# Altium PCB PCB2.PcbDoc (part 1 of 2)
Units mm, origin at the board's own origin, x right, y up, seen from the top; angles counter-clockwise.
Board outline 126 x 36 mm, 2 copper layers (Top Layer, Bottom Layer); 351 components, 48 nets, 702 pads, 346 vias.
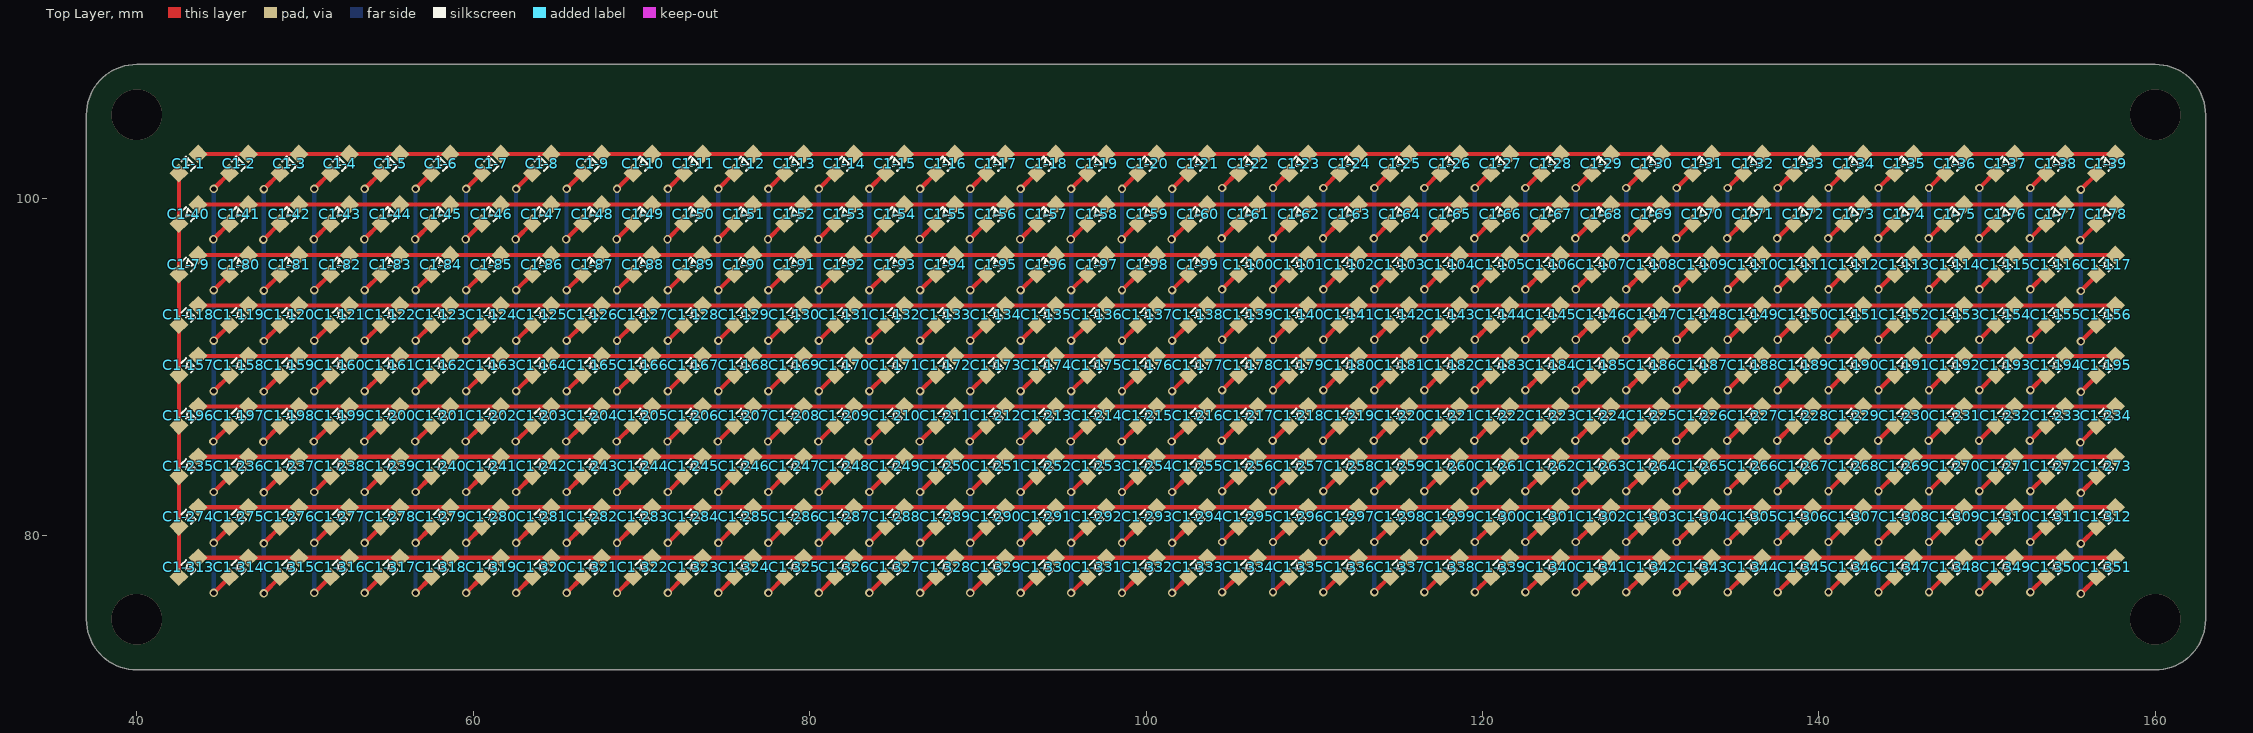
[diagram p0: Top Layer view]
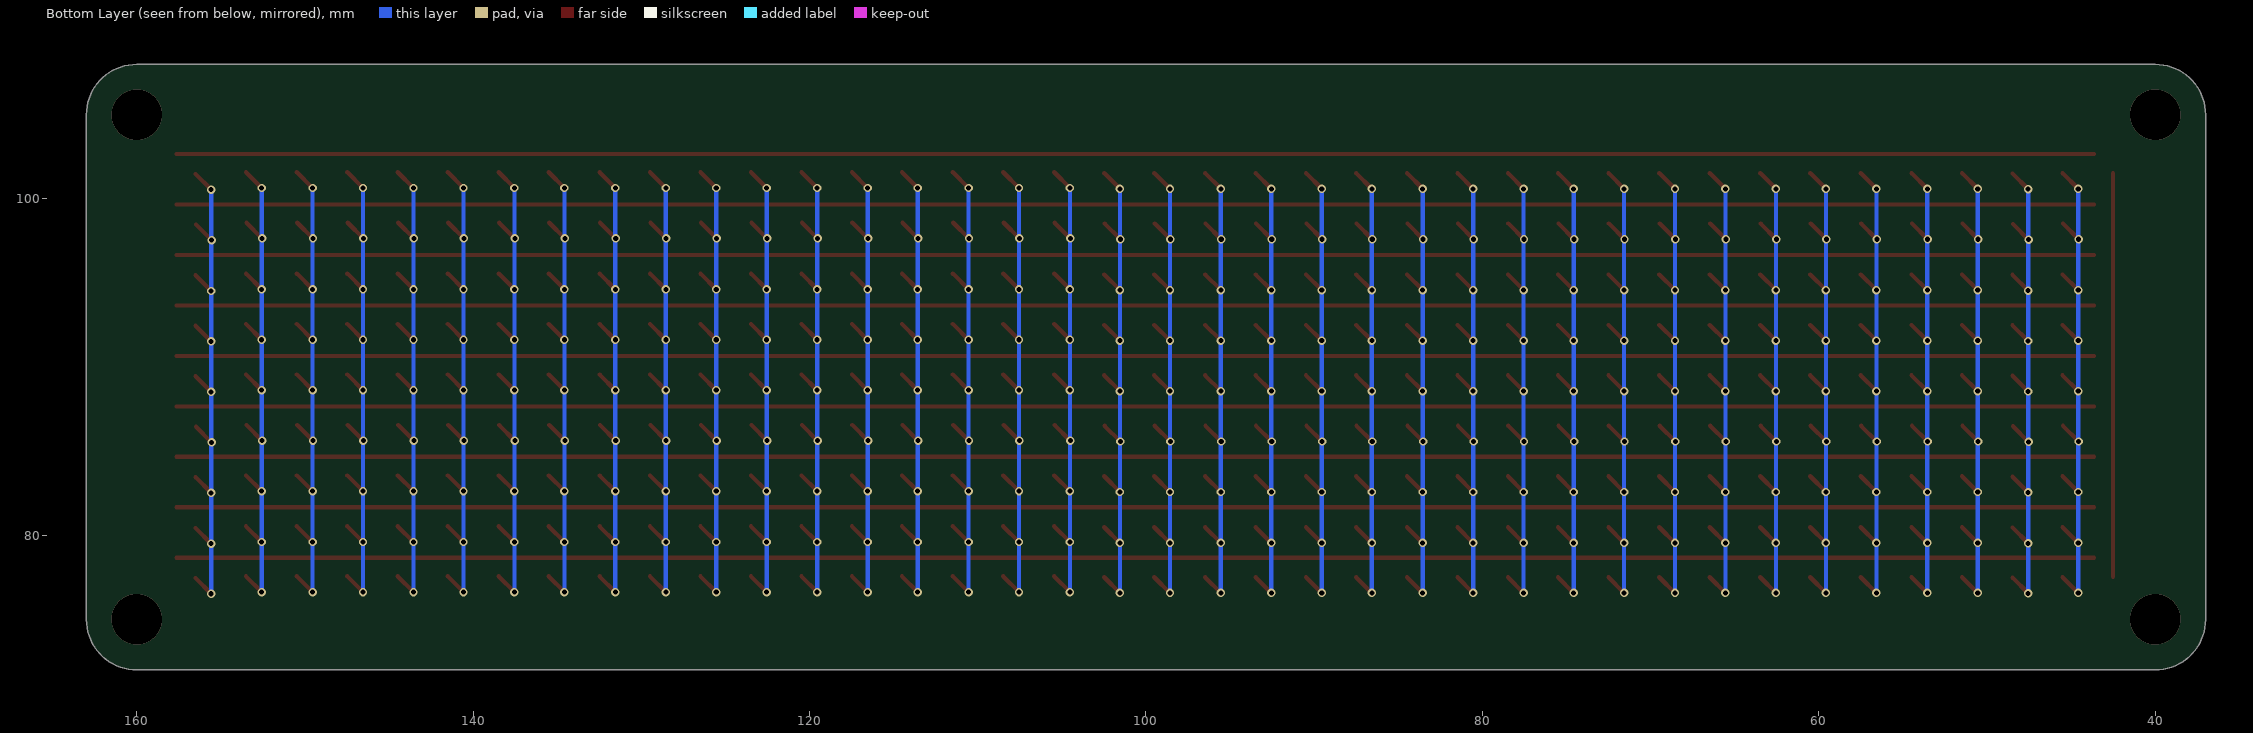
[diagram p1: Bottom Layer view, seen from below]

## Layer stack, top to bottom
Top Solder: solder mask 0.0102, Solder Resist, Dk 3.5
Top Layer: signal copper 0.0356
Dielectric 1: dielectric 0.32, FR-4, Dk 4.8
Bottom Layer: signal copper 0.0356
Bottom Solder: solder mask 0.0102, Solder Resist, Dk 3.5

## Board outline
40,72 cw(c40,75) 37,75 37,105 cw(c40,105) 40,108 160,108 cw(c160,105) 163,105 163,75 cw(c160,75) 160,72

## Design rules (kind name [scope] priority, off if disabled: settings)
Clearance [All] p1: gap=0.152 ignorepadtopadclearanceinfootprint=FALSE except(0.254: Arc-Arc Arc-Track Track-Track)
ComponentClearance [All] p1: gap=0 collisioncheckmode=3 verticalgap=0 showdistances=FALSE
PolygonConnect [All] p1: connectstyle=Relief reliefconductorwidth=0.254 reliefentries=4 polygonreliefangle="90 Angle" airgapwidth=0.254
RoutingCorners [All] p1: cornerstyle=Round minsetback=2.54 maxsetback=2.54
RoutingLayers RoutingLayers_1 [All] p1: top layer_v5=TRUE bottom layer_v5=TRUE
RoutingVias [All] p1: holewidth=0.3 width=0.5 viastyle="Through Hole" minholewidth=0.3 minwidth=0.5 maxholewidth=0.3 maxwidth=0.5
ShortCircuit [All] p1: allowed=TRUE
SolderMaskExpansion [All] p1: expansion=0.102
Width [All] p1: maxlimit=0.254 minlimit=0.254 preferedwidth=0.254
26 further rules are at their usual default settings.

## Components (designator, comment, footprint, x,y, rotation, side; value= is the part's Value field where it differs from the comment)
C1-1 "LED" "LED 0603(2)" 43.1,102.125 r225 top
C1-2 "LED" "LED 0603(2)" 46.1,102.125 r225 top
C1-3 "LED" "LED 0603(2)" 49.1,102.125 r225 top
C1-4 "LED" "LED 0603(2)" 52.1,102.125 r225 top
C1-5 "LED" "LED 0603(2)" 55.1,102.125 r225 top
C1-6 "LED" "LED 0603(2)" 58.1,102.125 r225 top
C1-7 "LED" "LED 0603(2)" 61.1,102.125 r225 top
C1-8 "LED" "LED 0603(2)" 64.1,102.125 r225 top
C1-9 "LED" "LED 0603(2)" 67.1,102.125 r225 top
C1-10 "LED" "LED 0603(2)" 70.1,102.125 r225 top
C1-11 "LED" "LED 0603(2)" 73.1,102.125 r225 top
C1-12 "LED" "LED 0603(2)" 76.1,102.125 r225 top
C1-13 "LED" "LED 0603(2)" 79.1,102.125 r225 top
C1-14 "LED" "LED 0603(2)" 82.1,102.125 r225 top
C1-15 "LED" "LED 0603(2)" 85.1,102.125 r225 top
C1-16 "LED" "LED 0603(2)" 88.1,102.125 r225 top
C1-17 "LED" "LED 0603(2)" 91.1,102.125 r225 top
C1-18 "LED" "LED 0603(2)" 94.1,102.125 r225 top
C1-19 "LED" "LED 0603(2)" 97.1,102.125 r225 top
C1-20 "LED" "LED 0603(2)" 100.1,102.125 r225 top
C1-21 "LED" "LED 0603(2)" 103.1,102.125 r225 top
C1-22 "LED" "LED 0603(2)" 106.1,102.125 r225 top
C1-23 "LED" "LED 0603(2)" 109.1,102.125 r225 top
C1-24 "LED" "LED 0603(2)" 112.1,102.125 r225 top
C1-25 "LED" "LED 0603(2)" 115.1,102.125 r225 top
C1-26 "LED" "LED 0603(2)" 118.1,102.125 r225 top
C1-27 "LED" "LED 0603(2)" 121.1,102.125 r225 top
C1-28 "LED" "LED 0603(2)" 124.1,102.125 r225 top
C1-29 "LED" "LED 0603(2)" 127.1,102.125 r225 top
C1-30 "LED" "LED 0603(2)" 130.1,102.125 r225 top
C1-31 "LED" "LED 0603(2)" 133.1,102.125 r225 top
C1-32 "LED" "LED 0603(2)" 136.1,102.125 r225 top
C1-33 "LED" "LED 0603(2)" 139.1,102.125 r225 top
C1-34 "LED" "LED 0603(2)" 142.1,102.125 r225 top
C1-35 "LED" "LED 0603(2)" 145.1,102.125 r225 top
C1-36 "LED" "LED 0603(2)" 148.1,102.125 r225 top
C1-37 "LED" "LED 0603(2)" 151.1,102.125 r225 top
C1-38 "LED" "LED 0603(2)" 154.1,102.125 r225 top
C1-39 "LED" "LED 0603(2)" 157.1,102.125 r225 top
C1-40 "LED" "LED 0603(2)" 43.1,99.125 r225 top
C1-41 "LED" "LED 0603(2)" 46.1,99.125 r225 top
C1-42 "LED" "LED 0603(2)" 49.1,99.125 r225 top
C1-43 "LED" "LED 0603(2)" 52.1,99.125 r225 top
C1-44 "LED" "LED 0603(2)" 55.1,99.125 r225 top
C1-45 "LED" "LED 0603(2)" 58.1,99.125 r225 top
C1-46 "LED" "LED 0603(2)" 61.1,99.125 r225 top
C1-47 "LED" "LED 0603(2)" 64.1,99.125 r225 top
C1-48 "LED" "LED 0603(2)" 67.1,99.125 r225 top
C1-49 "LED" "LED 0603(2)" 70.1,99.125 r225 top
C1-50 "LED" "LED 0603(2)" 73.1,99.125 r225 top
C1-51 "LED" "LED 0603(2)" 76.1,99.125 r225 top
C1-52 "LED" "LED 0603(2)" 79.1,99.125 r225 top
C1-53 "LED" "LED 0603(2)" 82.1,99.125 r225 top
C1-54 "LED" "LED 0603(2)" 85.1,99.125 r225 top
C1-55 "LED" "LED 0603(2)" 88.1,99.125 r225 top
C1-56 "LED" "LED 0603(2)" 91.1,99.125 r225 top
C1-57 "LED" "LED 0603(2)" 94.1,99.125 r225 top
C1-58 "LED" "LED 0603(2)" 97.1,99.125 r225 top
C1-59 "LED" "LED 0603(2)" 100.1,99.125 r225 top
C1-60 "LED" "LED 0603(2)" 103.1,99.125 r225 top
C1-61 "LED" "LED 0603(2)" 106.1,99.125 r225 top
C1-62 "LED" "LED 0603(2)" 109.1,99.125 r225 top
C1-63 "LED" "LED 0603(2)" 112.1,99.125 r225 top
C1-64 "LED" "LED 0603(2)" 115.1,99.125 r225 top
C1-65 "LED" "LED 0603(2)" 118.1,99.125 r225 top
C1-66 "LED" "LED 0603(2)" 121.1,99.125 r225 top
C1-67 "LED" "LED 0603(2)" 124.1,99.125 r225 top
C1-68 "LED" "LED 0603(2)" 127.1,99.125 r225 top
C1-69 "LED" "LED 0603(2)" 130.1,99.125 r225 top
C1-70 "LED" "LED 0603(2)" 133.1,99.125 r225 top
C1-71 "LED" "LED 0603(2)" 136.1,99.125 r225 top
C1-72 "LED" "LED 0603(2)" 139.1,99.125 r225 top
C1-73 "LED" "LED 0603(2)" 142.1,99.125 r225 top
C1-74 "LED" "LED 0603(2)" 145.1,99.125 r225 top
C1-75 "LED" "LED 0603(2)" 148.1,99.125 r225 top
C1-76 "LED" "LED 0603(2)" 151.1,99.125 r225 top
C1-77 "LED" "LED 0603(2)" 154.1,99.125 r225 top
C1-78 "LED" "LED 0603(2)" 157.1,99.125 r225 top
C1-79 "LED" "LED 0603(2)" 43.1,96.125 r225 top
C1-80 "LED" "LED 0603(2)" 46.1,96.125 r225 top
C1-81 "LED" "LED 0603(2)" 49.1,96.125 r225 top
C1-82 "LED" "LED 0603(2)" 52.1,96.125 r225 top
C1-83 "LED" "LED 0603(2)" 55.1,96.125 r225 top
C1-84 "LED" "LED 0603(2)" 58.1,96.125 r225 top
C1-85 "LED" "LED 0603(2)" 61.1,96.125 r225 top
C1-86 "LED" "LED 0603(2)" 64.1,96.125 r225 top
C1-87 "LED" "LED 0603(2)" 67.1,96.125 r225 top
C1-88 "LED" "LED 0603(2)" 70.1,96.125 r225 top
C1-89 "LED" "LED 0603(2)" 73.1,96.125 r225 top
C1-90 "LED" "LED 0603(2)" 76.1,96.125 r225 top
C1-91 "LED" "LED 0603(2)" 79.1,96.125 r225 top
C1-92 "LED" "LED 0603(2)" 82.1,96.125 r225 top
C1-93 "LED" "LED 0603(2)" 85.1,96.125 r225 top
C1-94 "LED" "LED 0603(2)" 88.1,96.125 r225 top
C1-95 "LED" "LED 0603(2)" 91.1,96.125 r225 top
C1-96 "LED" "LED 0603(2)" 94.1,96.125 r225 top
C1-97 "LED" "LED 0603(2)" 97.1,96.125 r225 top
C1-98 "LED" "LED 0603(2)" 100.1,96.125 r225 top
C1-99 "LED" "LED 0603(2)" 103.1,96.125 r225 top
C1-100 "LED" "LED 0603(2)" 106.1,96.125 r225 top
C1-101 "LED" "LED 0603(2)" 109.1,96.125 r225 top
C1-102 "LED" "LED 0603(2)" 112.1,96.125 r225 top
C1-103 "LED" "LED 0603(2)" 115.1,96.125 r225 top
C1-104 "LED" "LED 0603(2)" 118.1,96.125 r225 top
C1-105 "LED" "LED 0603(2)" 121.1,96.125 r225 top
C1-106 "LED" "LED 0603(2)" 124.1,96.125 r225 top
C1-107 "LED" "LED 0603(2)" 127.1,96.125 r225 top
C1-108 "LED" "LED 0603(2)" 130.1,96.125 r225 top
C1-109 "LED" "LED 0603(2)" 133.1,96.125 r225 top
C1-110 "LED" "LED 0603(2)" 136.1,96.125 r225 top
C1-111 "LED" "LED 0603(2)" 139.1,96.125 r225 top
C1-112 "LED" "LED 0603(2)" 142.1,96.125 r225 top
C1-113 "LED" "LED 0603(2)" 145.1,96.125 r225 top
C1-114 "LED" "LED 0603(2)" 148.1,96.125 r225 top
C1-115 "LED" "LED 0603(2)" 151.1,96.125 r225 top
C1-116 "LED" "LED 0603(2)" 154.1,96.125 r225 top
C1-117 "LED" "LED 0603(2)" 157.1,96.125 r225 top
C1-118 "LED" "LED 0603(2)" 43.1,93.125 r225 top
C1-119 "LED" "LED 0603(2)" 46.1,93.125 r225 top
C1-120 "LED" "LED 0603(2)" 49.1,93.125 r225 top
C1-121 "LED" "LED 0603(2)" 52.1,93.125 r225 top
C1-122 "LED" "LED 0603(2)" 55.1,93.125 r225 top
C1-123 "LED" "LED 0603(2)" 58.1,93.125 r225 top
C1-124 "LED" "LED 0603(2)" 61.1,93.125 r225 top
C1-125 "LED" "LED 0603(2)" 64.1,93.125 r225 top
C1-126 "LED" "LED 0603(2)" 67.1,93.125 r225 top
C1-127 "LED" "LED 0603(2)" 70.1,93.125 r225 top
C1-128 "LED" "LED 0603(2)" 73.1,93.125 r225 top
C1-129 "LED" "LED 0603(2)" 76.1,93.125 r225 top
C1-130 "LED" "LED 0603(2)" 79.1,93.125 r225 top
C1-131 "LED" "LED 0603(2)" 82.1,93.125 r225 top
C1-132 "LED" "LED 0603(2)" 85.1,93.125 r225 top
C1-133 "LED" "LED 0603(2)" 88.1,93.125 r225 top
C1-134 "LED" "LED 0603(2)" 91.1,93.125 r225 top
C1-135 "LED" "LED 0603(2)" 94.1,93.125 r225 top
C1-136 "LED" "LED 0603(2)" 97.1,93.125 r225 top
C1-137 "LED" "LED 0603(2)" 100.1,93.125 r225 top
C1-138 "LED" "LED 0603(2)" 103.1,93.125 r225 top
C1-139 "LED" "LED 0603(2)" 106.1,93.125 r225 top
C1-140 "LED" "LED 0603(2)" 109.1,93.125 r225 top
C1-141 "LED" "LED 0603(2)" 112.1,93.125 r225 top
C1-142 "LED" "LED 0603(2)" 115.1,93.125 r225 top
C1-143 "LED" "LED 0603(2)" 118.1,93.125 r225 top
C1-144 "LED" "LED 0603(2)" 121.1,93.125 r225 top
C1-145 "LED" "LED 0603(2)" 124.1,93.125 r225 top
C1-146 "LED" "LED 0603(2)" 127.1,93.125 r225 top
C1-147 "LED" "LED 0603(2)" 130.1,93.125 r225 top
C1-148 "LED" "LED 0603(2)" 133.1,93.125 r225 top
C1-149 "LED" "LED 0603(2)" 136.1,93.125 r225 top
C1-150 "LED" "LED 0603(2)" 139.1,93.125 r225 top
C1-151 "LED" "LED 0603(2)" 142.1,93.125 r225 top
C1-152 "LED" "LED 0603(2)" 145.1,93.125 r225 top
C1-153 "LED" "LED 0603(2)" 148.1,93.125 r225 top
C1-154 "LED" "LED 0603(2)" 151.1,93.125 r225 top
C1-155 "LED" "LED 0603(2)" 154.1,93.125 r225 top
C1-156 "LED" "LED 0603(2)" 157.1,93.125 r225 top
C1-157 "LED" "LED 0603(2)" 43.1,90.125 r225 top
C1-158 "LED" "LED 0603(2)" 46.1,90.125 r225 top
C1-159 "LED" "LED 0603(2)" 49.1,90.125 r225 top
C1-160 "LED" "LED 0603(2)" 52.1,90.125 r225 top
C1-161 "LED" "LED 0603(2)" 55.1,90.125 r225 top
C1-162 "LED" "LED 0603(2)" 58.1,90.125 r225 top
C1-163 "LED" "LED 0603(2)" 61.1,90.125 r225 top
C1-164 "LED" "LED 0603(2)" 64.1,90.125 r225 top
C1-165 "LED" "LED 0603(2)" 67.1,90.125 r225 top
C1-166 "LED" "LED 0603(2)" 70.1,90.125 r225 top
C1-167 "LED" "LED 0603(2)" 73.1,90.125 r225 top
C1-168 "LED" "LED 0603(2)" 76.1,90.125 r225 top
C1-169 "LED" "LED 0603(2)" 79.1,90.125 r225 top
C1-170 "LED" "LED 0603(2)" 82.1,90.125 r225 top
C1-171 "LED" "LED 0603(2)" 85.1,90.125 r225 top
C1-172 "LED" "LED 0603(2)" 88.1,90.125 r225 top
C1-173 "LED" "LED 0603(2)" 91.1,90.125 r225 top
C1-174 "LED" "LED 0603(2)" 94.1,90.125 r225 top
C1-175 "LED" "LED 0603(2)" 97.1,90.125 r225 top
C1-176 "LED" "LED 0603(2)" 100.1,90.125 r225 top
C1-177 "LED" "LED 0603(2)" 103.1,90.125 r225 top
C1-178 "LED" "LED 0603(2)" 106.1,90.125 r225 top
C1-179 "LED" "LED 0603(2)" 109.1,90.125 r225 top
C1-180 "LED" "LED 0603(2)" 112.1,90.125 r225 top
C1-181 "LED" "LED 0603(2)" 115.1,90.125 r225 top
C1-182 "LED" "LED 0603(2)" 118.1,90.125 r225 top
C1-183 "LED" "LED 0603(2)" 121.1,90.125 r225 top
C1-184 "LED" "LED 0603(2)" 124.1,90.125 r225 top
C1-185 "LED" "LED 0603(2)" 127.1,90.125 r225 top
C1-186 "LED" "LED 0603(2)" 130.1,90.125 r225 top
C1-187 "LED" "LED 0603(2)" 133.1,90.125 r225 top
C1-188 "LED" "LED 0603(2)" 136.1,90.125 r225 top
C1-189 "LED" "LED 0603(2)" 139.1,90.125 r225 top
C1-190 "LED" "LED 0603(2)" 142.1,90.125 r225 top
C1-191 "LED" "LED 0603(2)" 145.1,90.125 r225 top
C1-192 "LED" "LED 0603(2)" 148.1,90.125 r225 top
C1-193 "LED" "LED 0603(2)" 151.1,90.125 r225 top
C1-194 "LED" "LED 0603(2)" 154.1,90.125 r225 top
C1-195 "LED" "LED 0603(2)" 157.1,90.125 r225 top
C1-196 "LED" "LED 0603(2)" 43.1,87.125 r225 top
C1-197 "LED" "LED 0603(2)" 46.1,87.125 r225 top
C1-198 "LED" "LED 0603(2)" 49.1,87.125 r225 top
C1-199 "LED" "LED 0603(2)" 52.1,87.125 r225 top
C1-200 "LED" "LED 0603(2)" 55.1,87.125 r225 top
C1-201 "LED" "LED 0603(2)" 58.1,87.125 r225 top
C1-202 "LED" "LED 0603(2)" 61.1,87.125 r225 top
C1-203 "LED" "LED 0603(2)" 64.1,87.125 r225 top
C1-204 "LED" "LED 0603(2)" 67.1,87.125 r225 top
C1-205 "LED" "LED 0603(2)" 70.1,87.125 r225 top
C1-206 "LED" "LED 0603(2)" 73.1,87.125 r225 top
C1-207 "LED" "LED 0603(2)" 76.1,87.125 r225 top
C1-208 "LED" "LED 0603(2)" 79.1,87.125 r225 top
C1-209 "LED" "LED 0603(2)" 82.1,87.125 r225 top
C1-210 "LED" "LED 0603(2)" 85.1,87.125 r225 top
C1-211 "LED" "LED 0603(2)" 88.1,87.125 r225 top
C1-212 "LED" "LED 0603(2)" 91.1,87.125 r225 top
C1-213 "LED" "LED 0603(2)" 94.1,87.125 r225 top
C1-214 "LED" "LED 0603(2)" 97.1,87.125 r225 top
C1-215 "LED" "LED 0603(2)" 100.1,87.125 r225 top
C1-216 "LED" "LED 0603(2)" 103.1,87.125 r225 top
C1-217 "LED" "LED 0603(2)" 106.1,87.125 r225 top
C1-218 "LED" "LED 0603(2)" 109.1,87.125 r225 top
C1-219 "LED" "LED 0603(2)" 112.1,87.125 r225 top
C1-220 "LED" "LED 0603(2)" 115.1,87.125 r225 top
C1-221 "LED" "LED 0603(2)" 118.1,87.125 r225 top
C1-222 "LED" "LED 0603(2)" 121.1,87.125 r225 top
C1-223 "LED" "LED 0603(2)" 124.1,87.125 r225 top
C1-224 "LED" "LED 0603(2)" 127.1,87.125 r225 top
C1-225 "LED" "LED 0603(2)" 130.1,87.125 r225 top
C1-226 "LED" "LED 0603(2)" 133.1,87.125 r225 top
C1-227 "LED" "LED 0603(2)" 136.1,87.125 r225 top
C1-228 "LED" "LED 0603(2)" 139.1,87.125 r225 top
C1-229 "LED" "LED 0603(2)" 142.1,87.125 r225 top
C1-230 "LED" "LED 0603(2)" 145.1,87.125 r225 top
C1-231 "LED" "LED 0603(2)" 148.1,87.125 r225 top
C1-232 "LED" "LED 0603(2)" 151.1,87.125 r225 top
C1-233 "LED" "LED 0603(2)" 154.1,87.125 r225 top
C1-234 "LED" "LED 0603(2)" 157.1,87.125 r225 top
C1-235 "LED" "LED 0603(2)" 43.1,84.125 r225 top
C1-236 "LED" "LED 0603(2)" 46.1,84.125 r225 top
C1-237 "LED" "LED 0603(2)" 49.1,84.125 r225 top
C1-238 "LED" "LED 0603(2)" 52.1,84.125 r225 top
C1-239 "LED" "LED 0603(2)" 55.1,84.125 r225 top
C1-240 "LED" "LED 0603(2)" 58.1,84.125 r225 top
C1-241 "LED" "LED 0603(2)" 61.1,84.125 r225 top
C1-242 "LED" "LED 0603(2)" 64.1,84.125 r225 top
C1-243 "LED" "LED 0603(2)" 67.1,84.125 r225 top
C1-244 "LED" "LED 0603(2)" 70.1,84.125 r225 top
C1-245 "LED" "LED 0603(2)" 73.1,84.125 r225 top
C1-246 "LED" "LED 0603(2)" 76.1,84.125 r225 top
C1-247 "LED" "LED 0603(2)" 79.1,84.125 r225 top
C1-248 "LED" "LED 0603(2)" 82.1,84.125 r225 top
C1-249 "LED" "LED 0603(2)" 85.1,84.125 r225 top
C1-250 "LED" "LED 0603(2)" 88.1,84.125 r225 top
C1-251 "LED" "LED 0603(2)" 91.1,84.125 r225 top
C1-252 "LED" "LED 0603(2)" 94.1,84.125 r225 top
C1-253 "LED" "LED 0603(2)" 97.1,84.125 r225 top
C1-254 "LED" "LED 0603(2)" 100.1,84.125 r225 top
C1-255 "LED" "LED 0603(2)" 103.1,84.125 r225 top
C1-256 "LED" "LED 0603(2)" 106.1,84.125 r225 top
C1-257 "LED" "LED 0603(2)" 109.1,84.125 r225 top
C1-258 "LED" "LED 0603(2)" 112.1,84.125 r225 top
C1-259 "LED" "LED 0603(2)" 115.1,84.125 r225 top
C1-260 "LED" "LED 0603(2)" 118.1,84.125 r225 top
C1-261 "LED" "LED 0603(2)" 121.1,84.125 r225 top
C1-262 "LED" "LED 0603(2)" 124.1,84.125 r225 top
C1-263 "LED" "LED 0603(2)" 127.1,84.125 r225 top
C1-264 "LED" "LED 0603(2)" 130.1,84.125 r225 top
C1-265 "LED" "LED 0603(2)" 133.1,84.125 r225 top
C1-266 "LED" "LED 0603(2)" 136.1,84.125 r225 top
C1-267 "LED" "LED 0603(2)" 139.1,84.125 r225 top
C1-268 "LED" "LED 0603(2)" 142.1,84.125 r225 top
C1-269 "LED" "LED 0603(2)" 145.1,84.125 r225 top
C1-270 "LED" "LED 0603(2)" 148.1,84.125 r225 top
C1-271 "LED" "LED 0603(2)" 151.1,84.125 r225 top
C1-272 "LED" "LED 0603(2)" 154.1,84.125 r225 top
C1-273 "LED" "LED 0603(2)" 157.1,84.125 r225 top
C1-274 "LED" "LED 0603(2)" 43.1,81.125 r225 top
C1-275 "LED" "LED 0603(2)" 46.1,81.125 r225 top
C1-276 "LED" "LED 0603(2)" 49.1,81.125 r225 top
C1-277 "LED" "LED 0603(2)" 52.1,81.125 r225 top
C1-278 "LED" "LED 0603(2)" 55.1,81.125 r225 top
C1-279 "LED" "LED 0603(2)" 58.1,81.125 r225 top
C1-280 "LED" "LED 0603(2)" 61.1,81.125 r225 top
C1-281 "LED" "LED 0603(2)" 64.1,81.125 r225 top
C1-282 "LED" "LED 0603(2)" 67.1,81.125 r225 top
C1-283 "LED" "LED 0603(2)" 70.1,81.125 r225 top
C1-284 "LED" "LED 0603(2)" 73.1,81.125 r225 top
C1-285 "LED" "LED 0603(2)" 76.1,81.125 r225 top
C1-286 "LED" "LED 0603(2)" 79.1,81.125 r225 top
C1-287 "LED" "LED 0603(2)" 82.1,81.125 r225 top
C1-288 "LED" "LED 0603(2)" 85.1,81.125 r225 top
C1-289 "LED" "LED 0603(2)" 88.1,81.125 r225 top
C1-290 "LED" "LED 0603(2)" 91.1,81.125 r225 top
C1-291 "LED" "LED 0603(2)" 94.1,81.125 r225 top
C1-292 "LED" "LED 0603(2)" 97.1,81.125 r225 top
C1-293 "LED" "LED 0603(2)" 100.1,81.125 r225 top
C1-294 "LED" "LED 0603(2)" 103.1,81.125 r225 top
C1-295 "LED" "LED 0603(2)" 106.1,81.125 r225 top
C1-296 "LED" "LED 0603(2)" 109.1,81.125 r225 top
C1-297 "LED" "LED 0603(2)" 112.1,81.125 r225 top
C1-298 "LED" "LED 0603(2)" 115.1,81.125 r225 top
C1-299 "LED" "LED 0603(2)" 118.1,81.125 r225 top
C1-300 "LED" "LED 0603(2)" 121.1,81.125 r225 top
C1-301 "LED" "LED 0603(2)" 124.1,81.125 r225 top
C1-302 "LED" "LED 0603(2)" 127.1,81.125 r225 top
C1-303 "LED" "LED 0603(2)" 130.1,81.125 r225 top
C1-304 "LED" "LED 0603(2)" 133.1,81.125 r225 top
C1-305 "LED" "LED 0603(2)" 136.1,81.125 r225 top
C1-306 "LED" "LED 0603(2)" 139.1,81.125 r225 top
C1-307 "LED" "LED 0603(2)" 142.1,81.125 r225 top
C1-308 "LED" "LED 0603(2)" 145.1,81.125 r225 top
C1-309 "LED" "LED 0603(2)" 148.1,81.125 r225 top
C1-310 "LED" "LED 0603(2)" 151.1,81.125 r225 top
C1-311 "LED" "LED 0603(2)" 154.1,81.125 r225 top
C1-312 "LED" "LED 0603(2)" 157.1,81.125 r225 top
C1-313 "LED" "LED 0603(2)" 43.1,78.125 r225 top
C1-314 "LED" "LED 0603(2)" 46.1,78.125 r225 top
C1-315 "LED" "LED 0603(2)" 49.1,78.125 r225 top
C1-316 "LED" "LED 0603(2)" 52.1,78.125 r225 top
C1-317 "LED" "LED 0603(2)" 55.1,78.125 r225 top
C1-318 "LED" "LED 0603(2)" 58.1,78.125 r225 top
C1-319 "LED" "LED 0603(2)" 61.1,78.125 r225 top
C1-320 "LED" "LED 0603(2)" 64.1,78.125 r225 top
C1-321 "LED" "LED 0603(2)" 67.1,78.125 r225 top
C1-322 "LED" "LED 0603(2)" 70.1,78.125 r225 top
C1-323 "LED" "LED 0603(2)" 73.1,78.125 r225 top
C1-324 "LED" "LED 0603(2)" 76.1,78.125 r225 top
C1-325 "LED" "LED 0603(2)" 79.1,78.125 r225 top
C1-326 "LED" "LED 0603(2)" 82.1,78.125 r225 top
C1-327 "LED" "LED 0603(2)" 85.1,78.125 r225 top
C1-328 "LED" "LED 0603(2)" 88.1,78.125 r225 top
C1-329 "LED" "LED 0603(2)" 91.1,78.125 r225 top
C1-330 "LED" "LED 0603(2)" 94.1,78.125 r225 top
C1-331 "LED" "LED 0603(2)" 97.1,78.125 r225 top
C1-332 "LED" "LED 0603(2)" 100.1,78.125 r225 top
C1-333 "LED" "LED 0603(2)" 103.1,78.125 r225 top
C1-334 "LED" "LED 0603(2)" 106.1,78.125 r225 top
C1-335 "LED" "LED 0603(2)" 109.1,78.125 r225 top
C1-336 "LED" "LED 0603(2)" 112.1,78.125 r225 top
C1-337 "LED" "LED 0603(2)" 115.1,78.125 r225 top
C1-338 "LED" "LED 0603(2)" 118.1,78.125 r225 top
C1-339 "LED" "LED 0603(2)" 121.1,78.125 r225 top
C1-340 "LED" "LED 0603(2)" 124.1,78.125 r225 top
C1-341 "LED" "LED 0603(2)" 127.1,78.125 r225 top
C1-342 "LED" "LED 0603(2)" 130.1,78.125 r225 top
C1-343 "LED" "LED 0603(2)" 133.1,78.125 r225 top
C1-344 "LED" "LED 0603(2)" 136.1,78.125 r225 top
C1-345 "LED" "LED 0603(2)" 139.1,78.125 r225 top
C1-346 "LED" "LED 0603(2)" 142.1,78.125 r225 top
C1-347 "LED" "LED 0603(2)" 145.1,78.125 r225 top
C1-348 "LED" "LED 0603(2)" 148.1,78.125 r225 top
C1-349 "LED" "LED 0603(2)" 151.1,78.125 r225 top
C1-350 "LED" "LED 0603(2)" 154.1,78.125 r225 top
C1-351 "LED" "LED 0603(2)" 157.1,78.125 r225 top

## Footprints (in the part's own frame and the unit in brackets; to place one, negate y for a bottom-side part, rotate by r counter-clockwise, add the part's x,y. Pads: shape width x height; smd on the part's side, far side on the other; paste and mask are expansions set on the pad)
"LED 0603(2)" [mm]
  rect 0.8x0.8 smd: 1(-0.762,0) 2(0.838,0)
  silkscreen extent -0.16,-0.4 0.24,0.4

## Via types
v1: diameter 0.5, hole 0.3, Top Layer to Bottom Layer, 342 vias
v2: diameter 3, hole 3, Top Layer to Bottom Layer, 4 vias

## Nets (pads, with @x,y where several pads share a name; then routed paths per layer and width w, separated by ;. In a path a pad name is that pad's centre, name@x,y a point inside that pad or via, vN(x,y) a via of type N, cw(c..) or ccw(c..) an arc to the next point about the centre after c; other vN are vias at no path point)
CS1: C1-1.2 C1-40.2 C1-79.2 C1-118.2 C1-157.2 C1-196.2 C1-235.2 C1-274.2 C1-313.2 | length 24
  Top Layer w0.254: C1-313.2@42.507,77.532 C1-274.2@42.507,80.532 C1-235.2@42.507,83.532 C1-196.2@42.507,86.532 C1-157.2@42.507,89.532 C1-118.2@42.507,92.532 C1-79.2@42.507,95.532 C1-40.2@42.507,98.532 C1-1.2@42.507,101.532
CS2: C1-2.2 C1-41.2 C1-80.2 C1-119.2 C1-158.2 C1-197.2 C1-236.2 C1-275.2 C1-314.2 | length 35.8
  Top Layer w0.254: v1(44.55,85.575) C1-197.2@45.482,86.507 ; v1(44.55,97.6) C1-41.2@45.482,98.532 ; v1(44.575,76.575) C1-314.2@45.507,77.507 ; v1(44.575,79.55) C1-275.2@45.507,80.482 ; v1(44.575,82.575) C1-236.2@45.507,83.507 ; v1(44.575,88.575) C1-158.2@45.507,89.507 ; v1(44.575,91.575) C1-119.2@45.507,92.507 ; v1(44.575,94.575) C1-80.2@45.507,95.507 ; v1(44.575,100.6) C1-2.2@45.507,101.532
  Bottom Layer w0.254: v1(44.575,76.575) v1(44.575,79.55) v1(44.575,82.575) v1(44.575,88.575) v1(44.575,91.575) v1(44.575,94.575) v1@44.575,100.55
CS3: C1-3.2 C1-42.2 C1-81.2 C1-120.2 C1-159.2 C1-198.2 C1-237.2 C1-276.2 C1-315.2 | length 35.8
  Top Layer w0.254: v1(47.525,85.55) C1-198.2@48.457,86.482 ; v1(47.525,97.575) C1-42.2@48.457,98.507 ; v1(47.55,76.55) C1-315.2@48.482,77.482 ; v1(47.55,79.525) C1-276.2@48.482,80.457 ; v1(47.55,82.55) C1-237.2@48.482,83.482 ; v1(47.55,88.55) C1-159.2@48.482,89.482 ; v1(47.55,91.55) C1-120.2@48.482,92.482 ; v1(47.55,94.55) C1-81.2@48.482,95.482 ; v1(47.55,100.575) C1-3.2@48.482,101.507
  Bottom Layer w0.254: v1(47.55,76.55) v1(47.55,79.525) v1(47.55,82.55) v1(47.55,88.55) v1(47.55,91.55) v1(47.55,94.55) v1@47.55,100.525
CS4: C1-4.2 C1-43.2 C1-82.2 C1-121.2 C1-160.2 C1-199.2 C1-238.2 C1-277.2 C1-316.2 | length 35.8
  Top Layer w0.254: v1(50.525,85.575) C1-199.2@51.457,86.507 ; v1(50.525,97.6) C1-43.2@51.457,98.532 ; v1(50.55,76.575) C1-316.2@51.482,77.507 ; v1(50.55,79.55) C1-277.2@51.482,80.482 ; v1(50.55,82.575) C1-238.2@51.482,83.507 ; v1(50.55,88.575) C1-160.2@51.482,89.507 ; v1(50.55,91.575) C1-121.2@51.482,92.507 ; v1(50.55,94.575) C1-82.2@51.482,95.507 ; v1(50.55,100.6) C1-4.2@51.482,101.532
  Bottom Layer w0.254: v1(50.55,76.575) v1(50.55,79.55) v1(50.55,82.575) v1(50.55,88.575) v1(50.55,91.575) v1(50.55,94.575) v1@50.55,100.55
CS5: C1-5.2 C1-44.2 C1-83.2 C1-122.2 C1-161.2 C1-200.2 C1-239.2 C1-278.2 C1-317.2 | length 35.8
  Top Layer w0.254: v1(53.525,85.575) C1-200.2@54.457,86.507 ; v1(53.525,97.6) C1-44.2@54.457,98.532 ; v1(53.55,76.575) C1-317.2@54.482,77.507 ; v1(53.55,79.55) C1-278.2@54.482,80.482 ; v1(53.55,82.575) C1-239.2@54.482,83.507 ; v1(53.55,88.575) C1-161.2@54.482,89.507 ; v1(53.55,91.575) C1-122.2@54.482,92.507 ; v1(53.55,94.575) C1-83.2@54.482,95.507 ; v1(53.55,100.6) C1-5.2@54.482,101.532
  Bottom Layer w0.254: v1(53.55,76.575) v1(53.55,79.55) v1(53.55,82.575) v1(53.55,88.575) v1(53.55,91.575) v1(53.55,94.575) v1@53.55,100.55
CS6: C1-6.2 C1-45.2 C1-84.2 C1-123.2 C1-162.2 C1-201.2 C1-240.2 C1-279.2 C1-318.2 | length 35.8
  Top Layer w0.254: v1(56.55,85.575) C1-201.2@57.482,86.507 ; v1(56.55,97.6) C1-45.2@57.482,98.532 ; v1(56.575,76.575) C1-318.2@57.507,77.507 ; v1(56.575,79.55) C1-279.2@57.507,80.482 ; v1(56.575,82.575) C1-240.2@57.507,83.507 ; v1(56.575,88.575) C1-162.2@57.507,89.507 ; v1(56.575,91.575) C1-123.2@57.507,92.507 ; v1(56.575,94.575) C1-84.2@57.507,95.507 ; v1(56.575,100.6) C1-6.2@57.507,101.532
  Bottom Layer w0.254: v1(56.575,76.575) v1(56.575,79.55) v1(56.575,82.575) v1(56.575,88.575) v1(56.575,91.575) v1(56.575,94.575) v1@56.575,100.55
CS7: C1-7.2 C1-46.2 C1-85.2 C1-124.2 C1-163.2 C1-202.2 C1-241.2 C1-280.2 C1-319.2 | length 35.8
  Top Layer w0.254: v1(59.55,85.575) C1-202.2@60.482,86.507 ; v1(59.55,97.6) C1-46.2@60.482,98.532 ; v1(59.575,76.575) C1-319.2@60.507,77.507 ; v1(59.575,79.55) C1-280.2@60.507,80.482 ; v1(59.575,82.575) C1-241.2@60.507,83.507 ; v1(59.575,88.575) C1-163.2@60.507,89.507 ; v1(59.575,91.575) C1-124.2@60.507,92.507 ; v1(59.575,94.575) C1-85.2@60.507,95.507 ; v1(59.575,100.6) C1-7.2@60.507,101.532
  Bottom Layer w0.254: v1(59.575,76.575) v1(59.575,79.55) v1(59.575,82.575) v1(59.575,88.575) v1(59.575,91.575) v1(59.575,94.575) v1@59.575,100.55
CS8: C1-8.2 C1-47.2 C1-86.2 C1-125.2 C1-164.2 C1-203.2 C1-242.2 C1-281.2 C1-320.2 | length 35.8
  Top Layer w0.254: v1(62.525,85.575) C1-203.2@63.457,86.507 ; v1(62.525,97.6) C1-47.2@63.457,98.532 ; v1(62.55,76.575) C1-320.2@63.482,77.507 ; v1(62.55,79.55) C1-281.2@63.482,80.482 ; v1(62.55,82.575) C1-242.2@63.482,83.507 ; v1(62.55,88.575) C1-164.2@63.482,89.507 ; v1(62.55,91.575) C1-125.2@63.482,92.507 ; v1(62.55,94.575) C1-86.2@63.482,95.507 ; v1(62.55,100.6) C1-8.2@63.482,101.532
  Bottom Layer w0.254: v1(62.55,76.575) v1(62.55,79.55) v1(62.55,82.575) v1(62.55,88.575) v1(62.55,91.575) v1(62.55,94.575) v1@62.55,100.55
CS9: C1-9.2 C1-48.2 C1-87.2 C1-126.2 C1-165.2 C1-204.2 C1-243.2 C1-282.2 C1-321.2 | length 35.8
  Top Layer w0.254: v1(65.525,85.575) C1-204.2@66.457,86.507 ; v1(65.525,97.6) C1-48.2@66.457,98.532 ; v1(65.55,76.575) C1-321.2@66.482,77.507 ; v1(65.55,79.55) C1-282.2@66.482,80.482 ; v1(65.55,82.575) C1-243.2@66.482,83.507 ; v1(65.55,88.575) C1-165.2@66.482,89.507 ; v1(65.55,91.575) C1-126.2@66.482,92.507 ; v1(65.55,94.575) C1-87.2@66.482,95.507 ; v1(65.55,100.6) C1-9.2@66.482,101.532
  Bottom Layer w0.254: v1(65.55,76.575) v1(65.55,79.55) v1(65.55,82.575) v1(65.55,88.575) v1(65.55,91.575) v1(65.55,94.575) v1@65.55,100.55
CS10: C1-10.2 C1-49.2 C1-88.2 C1-127.2 C1-166.2 C1-205.2 C1-244.2 C1-283.2 C1-322.2 | length 35.8
  Top Layer w0.254: v1(68.525,85.575) C1-205.2@69.457,86.507 ; v1(68.525,97.6) C1-49.2@69.457,98.532 ; v1(68.55,76.575) C1-322.2@69.482,77.507 ; v1(68.55,79.55) C1-283.2@69.482,80.482 ; v1(68.55,82.575) C1-244.2@69.482,83.507 ; v1(68.55,88.575) C1-166.2@69.482,89.507 ; v1(68.55,91.575) C1-127.2@69.482,92.507 ; v1(68.55,94.575) C1-88.2@69.482,95.507 ; v1(68.55,100.6) C1-10.2@69.482,101.532
  Bottom Layer w0.254: v1(68.55,76.575) v1(68.55,79.55) v1(68.55,82.575) v1(68.55,88.575) v1(68.55,91.575) v1(68.55,94.575) v1@68.55,100.55
CS11: C1-11.2 C1-50.2 C1-89.2 C1-128.2 C1-167.2 C1-206.2 C1-245.2 C1-284.2 C1-323.2 | length 35.8
  Top Layer w0.254: v1(71.55,85.575) C1-206.2@72.482,86.507 ; v1(71.55,97.6) C1-50.2@72.482,98.532 ; v1(71.575,76.575) C1-323.2@72.507,77.507 ; v1(71.575,79.55) C1-284.2@72.507,80.482 ; v1(71.575,82.575) C1-245.2@72.507,83.507 ; v1(71.575,88.575) C1-167.2@72.507,89.507 ; v1(71.575,91.575) C1-128.2@72.507,92.507 ; v1(71.575,94.575) C1-89.2@72.507,95.507 ; v1(71.575,100.6) C1-11.2@72.507,101.532
  Bottom Layer w0.254: v1(71.575,76.575) v1(71.575,79.55) v1(71.575,82.575) v1(71.575,88.575) v1(71.575,91.575) v1(71.575,94.575) v1@71.575,100.55
CS12: C1-12.2 C1-51.2 C1-90.2 C1-129.2 C1-168.2 C1-207.2 C1-246.2 C1-285.2 C1-324.2 | length 35.8
  Top Layer w0.254: v1(74.55,85.575) C1-207.2@75.482,86.507 ; v1(74.55,97.6) C1-51.2@75.482,98.532 ; v1(74.575,76.575) C1-324.2@75.507,77.507 ; v1(74.575,79.55) C1-285.2@75.507,80.482 ; v1(74.575,82.575) C1-246.2@75.507,83.507 ; v1(74.575,88.575) C1-168.2@75.507,89.507 ; v1(74.575,91.575) C1-129.2@75.507,92.507 ; v1(74.575,94.575) C1-90.2@75.507,95.507 ; v1(74.575,100.6) C1-12.2@75.507,101.532
  Bottom Layer w0.254: v1(74.575,76.575) v1(74.575,79.55) v1(74.575,82.575) v1(74.575,88.575) v1(74.575,91.575) v1(74.575,94.575) v1@74.575,100.55
CS13: C1-13.2 C1-52.2 C1-91.2 C1-130.2 C1-169.2 C1-208.2 C1-247.2 C1-286.2 C1-325.2 | length 35.8
  Top Layer w0.254: v1(77.525,85.575) C1-208.2@78.457,86.507 ; v1(77.525,97.6) C1-52.2@78.457,98.532 ; v1(77.55,76.575) C1-325.2@78.482,77.507 ; v1(77.55,79.55) C1-286.2@78.482,80.482 ; v1(77.55,82.575) C1-247.2@78.482,83.507 ; v1(77.55,88.575) C1-169.2@78.482,89.507 ; v1(77.55,91.575) C1-130.2@78.482,92.507 ; v1(77.55,94.575) C1-91.2@78.482,95.507 ; v1(77.55,100.6) C1-13.2@78.482,101.532
  Bottom Layer w0.254: v1(77.55,76.575) v1(77.55,79.55) v1(77.55,82.575) v1(77.55,88.575) v1(77.55,91.575) v1(77.55,94.575) v1@77.55,100.55
CS14: C1-14.2 C1-53.2 C1-92.2 C1-131.2 C1-170.2 C1-209.2 C1-248.2 C1-287.2 C1-326.2 | length 35.8
  Top Layer w0.254: v1(80.525,85.575) C1-209.2@81.457,86.507 ; v1(80.525,97.6) C1-53.2@81.457,98.532 ; v1(80.55,76.575) C1-326.2@81.482,77.507 ; v1(80.55,79.55) C1-287.2@81.482,80.482 ; v1(80.55,82.575) C1-248.2@81.482,83.507 ; v1(80.55,88.575) C1-170.2@81.482,89.507 ; v1(80.55,91.575) C1-131.2@81.482,92.507 ; v1(80.55,94.575) C1-92.2@81.482,95.507 ; v1(80.55,100.6) C1-14.2@81.482,101.532
  Bottom Layer w0.254: v1(80.55,76.575) v1(80.55,79.55) v1(80.55,82.575) v1(80.55,88.575) v1(80.55,91.575) v1(80.55,94.575) v1@80.55,100.55
CS15: C1-15.2 C1-54.2 C1-93.2 C1-132.2 C1-171.2 C1-210.2 C1-249.2 C1-288.2 C1-327.2 | length 35.8
  Top Layer w0.254: v1(83.525,85.575) C1-210.2@84.457,86.507 ; v1(83.525,97.6) C1-54.2@84.457,98.532 ; v1(83.55,76.575) C1-327.2@84.482,77.507 ; v1(83.55,79.55) C1-288.2@84.482,80.482 ; v1(83.55,82.575) C1-249.2@84.482,83.507 ; v1(83.55,88.575) C1-171.2@84.482,89.507 ; v1(83.55,91.575) C1-132.2@84.482,92.507 ; v1(83.55,94.575) C1-93.2@84.482,95.507 ; v1(83.55,100.6) C1-15.2@84.482,101.532
  Bottom Layer w0.254: v1(83.55,76.575) v1(83.55,79.55) v1(83.55,82.575) v1(83.55,88.575) v1(83.55,91.575) v1(83.55,94.575) v1@83.55,100.55
CS16: C1-16.2 C1-55.2 C1-94.2 C1-133.2 C1-172.2 C1-211.2 C1-250.2 C1-289.2 C1-328.2 | length 35.8
  Top Layer w0.254: v1(86.55,85.575) C1-211.2@87.482,86.507 ; v1(86.55,97.6) C1-55.2@87.482,98.532 ; v1(86.575,76.575) C1-328.2@87.507,77.507 ; v1(86.575,79.55) C1-289.2@87.507,80.482 ; v1(86.575,82.575) C1-250.2@87.507,83.507 ; v1(86.575,88.575) C1-172.2@87.507,89.507 ; v1(86.575,91.575) C1-133.2@87.507,92.507 ; v1(86.575,94.575) C1-94.2@87.507,95.507 ; v1(86.575,100.6) C1-16.2@87.507,101.532
  Bottom Layer w0.254: v1(86.575,76.575) v1(86.575,79.55) v1(86.575,82.575) v1(86.575,88.575) v1(86.575,91.575) v1(86.575,94.575) v1@86.575,100.55
CS17: C1-17.2 C1-56.2 C1-95.2 C1-134.2 C1-173.2 C1-212.2 C1-251.2 C1-290.2 C1-329.2 | length 35.8
  Top Layer w0.254: v1(89.525,85.575) C1-212.2@90.457,86.507 ; v1(89.525,97.6) C1-56.2@90.457,98.532 ; v1(89.55,76.575) C1-329.2@90.482,77.507 ; v1(89.55,79.55) C1-290.2@90.482,80.482 ; v1(89.55,82.575) C1-251.2@90.482,83.507 ; v1(89.55,88.575) C1-173.2@90.482,89.507 ; v1(89.55,91.575) C1-134.2@90.482,92.507 ; v1(89.55,94.575) C1-95.2@90.482,95.507 ; v1(89.55,100.6) C1-17.2@90.482,101.532
  Bottom Layer w0.254: v1(89.55,76.575) v1(89.55,79.55) v1(89.55,82.575) v1(89.55,88.575) v1(89.55,91.575) v1(89.55,94.575) v1@89.55,100.55